# EAGLE board Zaxis3 (EAGLE 9.6.2)
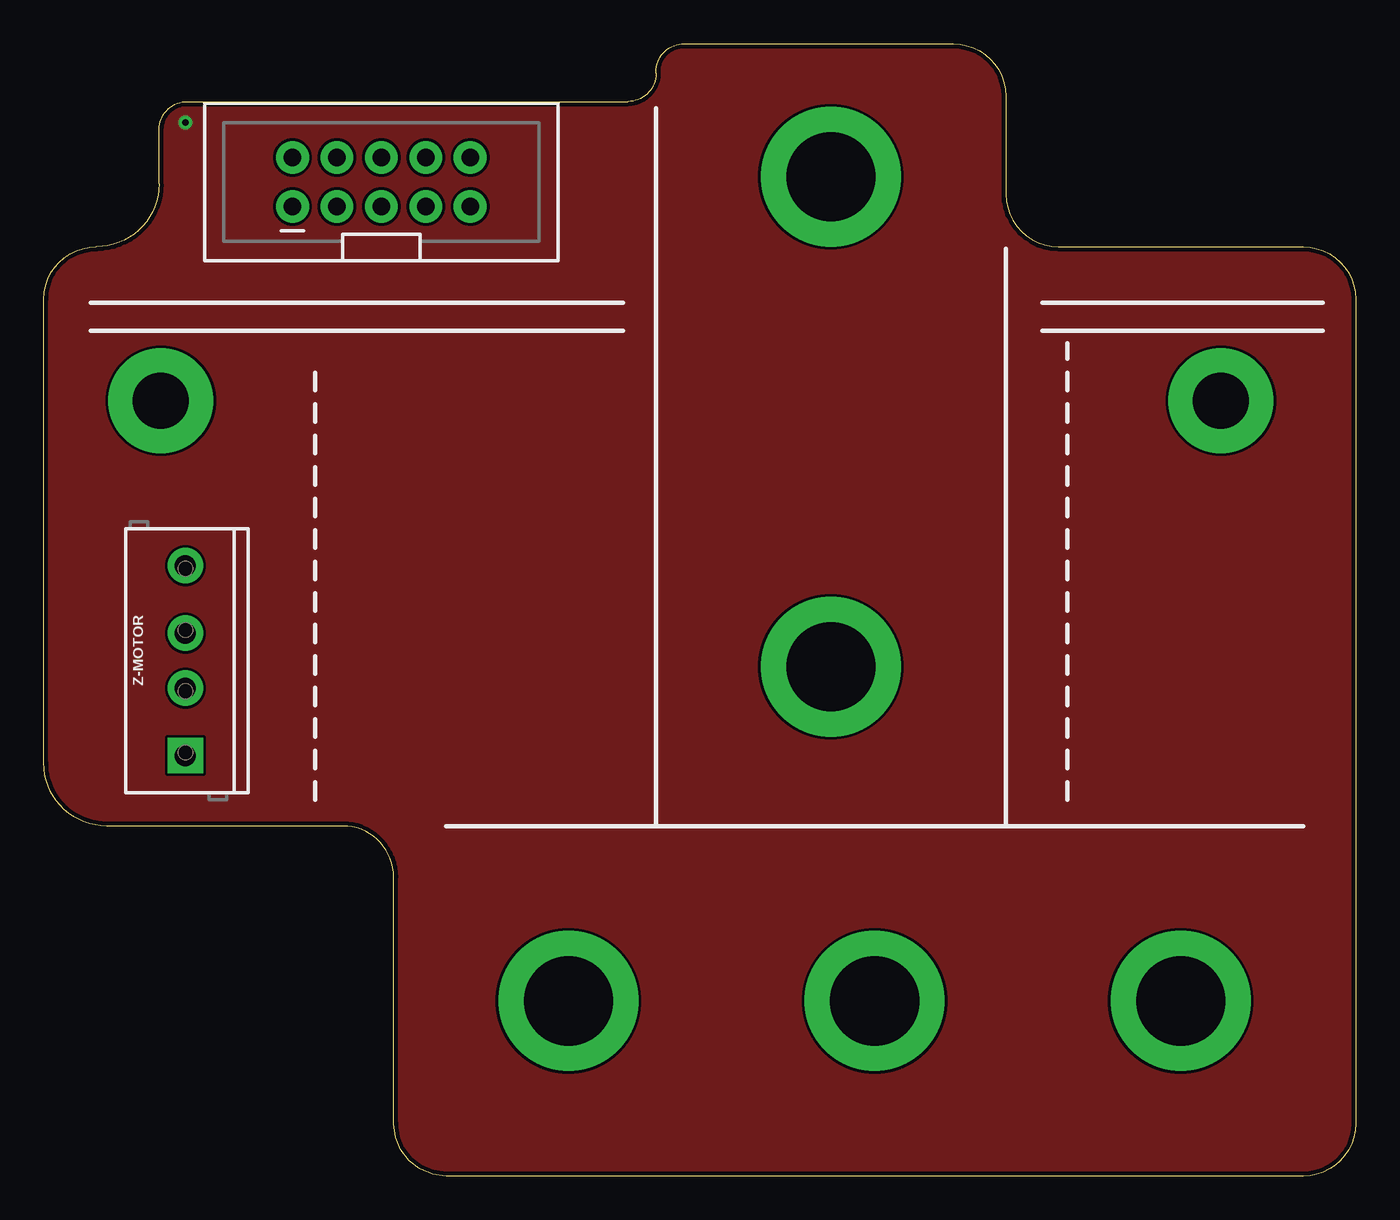
[diagram p0: board, top side]
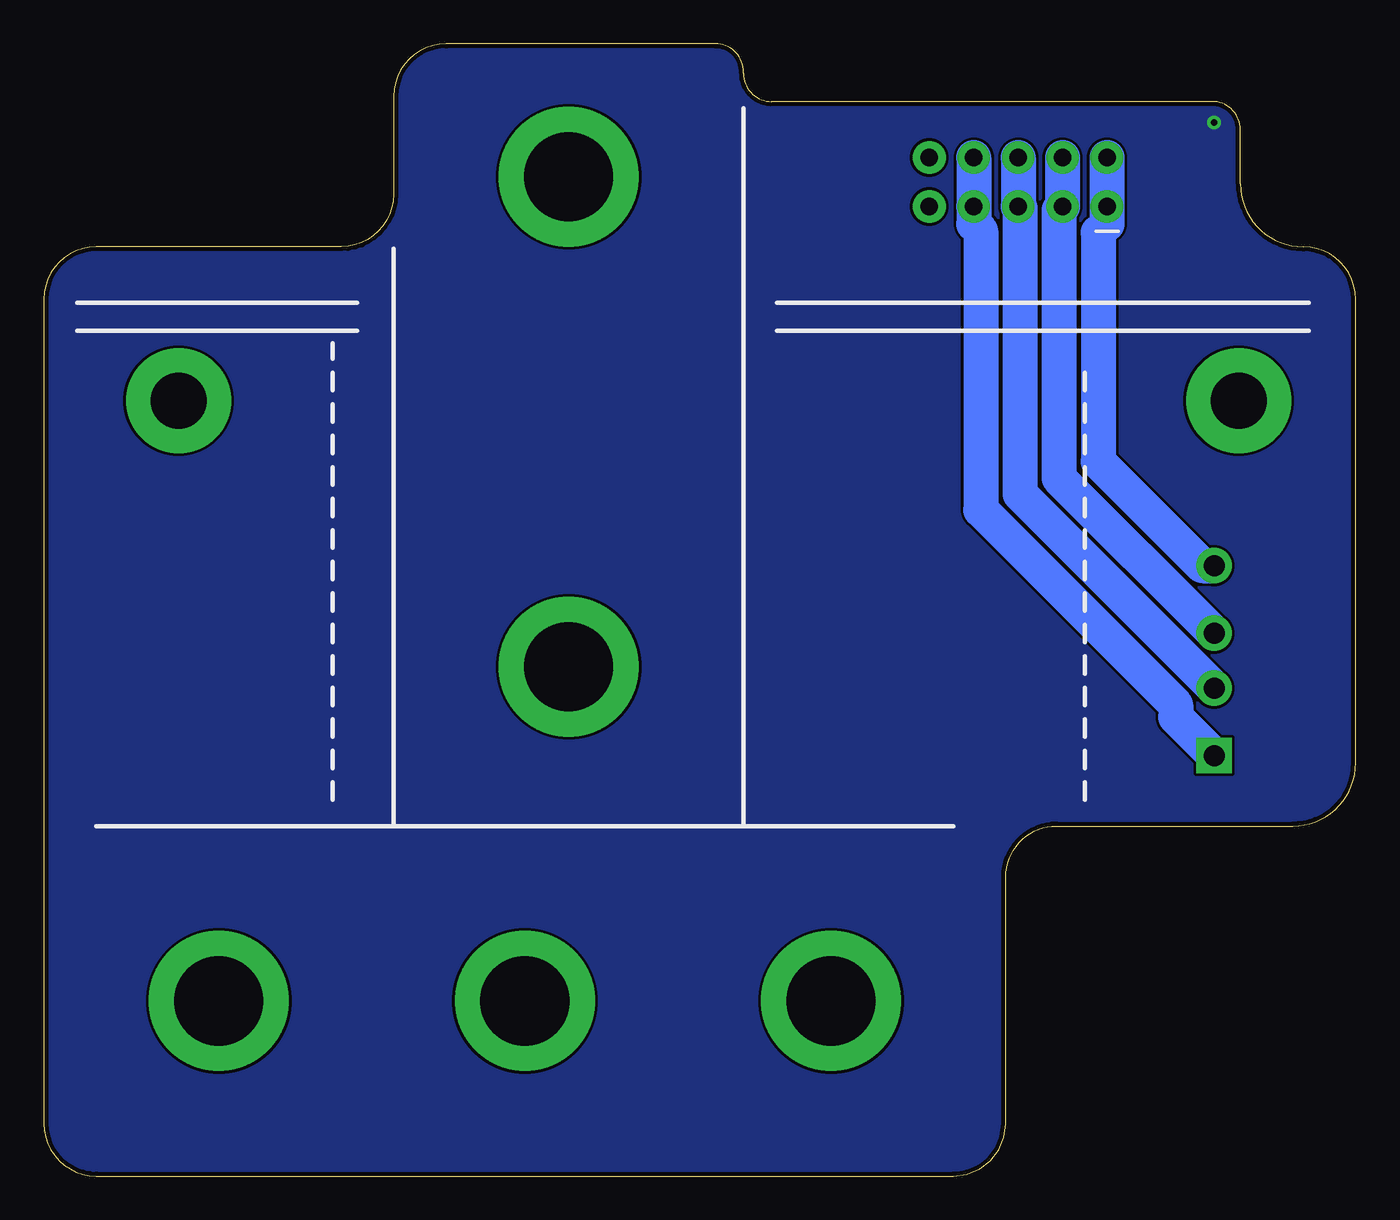
[diagram p1: board, bottom side, seen from below]

Size 75 x 64.7 mm. Coordinates in mm from the lower left corner, seen from the top.
Outline: 72,0 23,0 22.22,0.1 21.5,0.4 20.88,0.88 20.4,1.5 20.1,2.22 20,3 20,17.1 arc90 17.1,20 3.6,20 arc-90 0,23.6 0,50.1 0.03,50.49 0.1,50.88 0.23,51.25 0.4,51.6 0.62,51.93 0.88,52.22 1.17,52.48 1.5,52.7 1.85,52.87 2.22,53 2.61,53.07 3,53.1 arc90 6.6,56.7 6.6,59.8 arc-90 8.2,61.4 33.4,61.4 arc90 35,63 35,63.1 arc-90 36.6,64.7 52,64.7 52.39,64.67 52.78,64.6 53.15,64.47 53.5,64.3 53.83,64.08 54.12,63.82 54.38,63.53 54.6,63.2 54.77,62.85 54.9,62.48 54.97,62.09 55,61.7 55,56.1 55.03,55.71 55.1,55.32 55.23,54.95 55.4,54.6 55.62,54.27 55.88,53.98 56.17,53.72 56.5,53.5 56.85,53.33 57.22,53.2 57.61,53.13 58,53.1 72,53.1 72.39,53.07 72.78,53 73.15,52.87 73.5,52.7 73.83,52.48 74.12,52.22 74.38,51.93 74.6,51.6 74.77,51.25 74.9,50.88 74.97,50.49 75,50.1 75,3 74.97,2.61 74.9,2.22 74.77,1.85 74.6,1.5 74.38,1.17 74.12,0.88 73.83,0.62 73.5,0.4 73.15,0.23 72.78,0.1 72.39,0.03 72,0
Copper layers (1*16): Top 0.035mm / dielectric 1.5mm / Bottom 0.035mm
Design rules "default *": minimum track width 6mil, minimum drill 0.35mm, track to track 6mil, track to pad 6mil, pad to pad 6mil, via to via 6mil, smd to smd 6mil, copper to edge 10mil, drill to drill 6mil, minimum pad ring 10mil, minimum via ring 8mil, stop-mask expansion 4mil, vias tented up to drill 0mil, thermal gap 10mil
Net classes: 0 default: width 0.203 mm, clearance 0.152 mm

## Footprints (pad centres in the part's own frame; a part is rotated, then mirrored left to right if it is on the bottom)
2X5-SHROUDED_LOCK = drill 1.016 pad 1.88: 1 -1.397,5.08; 2 1.397,5.08; 3 -1.397,2.54; 4 1.397,2.54; 5 -1.397,0; 6 1.397,0; 7 -1.397,-2.54; 8 1.397,-2.54; 9 -1.397,-5.08; 10 1.397,-5.08
SCREWTERMINAL-3.5MM-4_LOCK = drill 1.2 pad 2.032 square: 1 -0.178,0 | drill 1.2 pad 2.032: 2 3.678,0; 3 6.822,0; 4 10.678,0

## Placement (x,y rotation side)
J2  [2X5-SHROUDED_LOCK]  19.3,56.8 90 top
Z-MOTOR  [SCREWTERMINAL-3.5MM-4_LOCK]  8.1,24.2 90 top

## Library data of the parts
J2 = SparkFun-Connectors; PROD_ID: CONN-08671; SF_ID: PRT-08506
Z-MOTOR = SparkFun-Connectors

## Nets
Z-MOTOR-1: J2.7 J2.8 Z-MOTOR.1
Z-MOTOR-2: J2.5 J2.6 Z-MOTOR.2
Z-MOTOR-3: J2.3 J2.4 Z-MOTOR.3
Z-MOTOR-4: J2.1 J2.2 Z-MOTOR.4

## Tracks (layer width: path | path; a pad name or v marks a point on that pad's centre or on a via)
GND  (via drill 0.35)
  other vias: 8.1,60.2
  pour Top: -2.7,64.1 -2.7,9.5 9.8,-3 74.7,-3 79.4,1.7 79.4,48.4 59.3,68.5 1.7,68.5
  pour Bottom: 0.1,62.6 0.1,8 12.6,-4.5 77.5,-4.5 82.2,0.2 82.2,46.9 62.1,67 4.5,67
N$40  (via drill 5.1 pad 8)
  other vias: 64.99,10
N$41  (via drill 5.1 pad 8)
  other vias: 29.99,10
N$42  (via drill 5.1 pad 8)
  other vias: 47.49,10
N$47  (via drill 5.1 pad 8)
  other vias: 44.99,29.1
N$50  (via drill 3.2 pad 6)
  other vias: 67.29,44.3
N$51  (via drill 5.1 pad 8)
  other vias: 44.99,57.1
Z-MOTOR-1
  Bottom 2: J2.8 J2.7 21.84,54.4 21.44,54 21.44,38.06 10.3,26.92 10.3,26.22 Z-MOTOR.1
Z-MOTOR-2
  Bottom 2: J2.6 J2.5 19.2,55.3 19.2,38.98 Z-MOTOR.2
Z-MOTOR-3
  Bottom 2: J2.4 J2.3 16.96,55.2 16.96,39.88 Z-MOTOR.3
Z-MOTOR-4
  Bottom 2: J2.2 J2.1 14.22,54.4 14.72,53.9 14.72,40.82 8.78,34.88 Z-MOTOR.4
ZTEEGND  (via drill 3.2 pad 6)
  other vias: 6.69,44.3